# EAGLE board ledunipcb3_withholes_rotated (EAGLE 6.1)
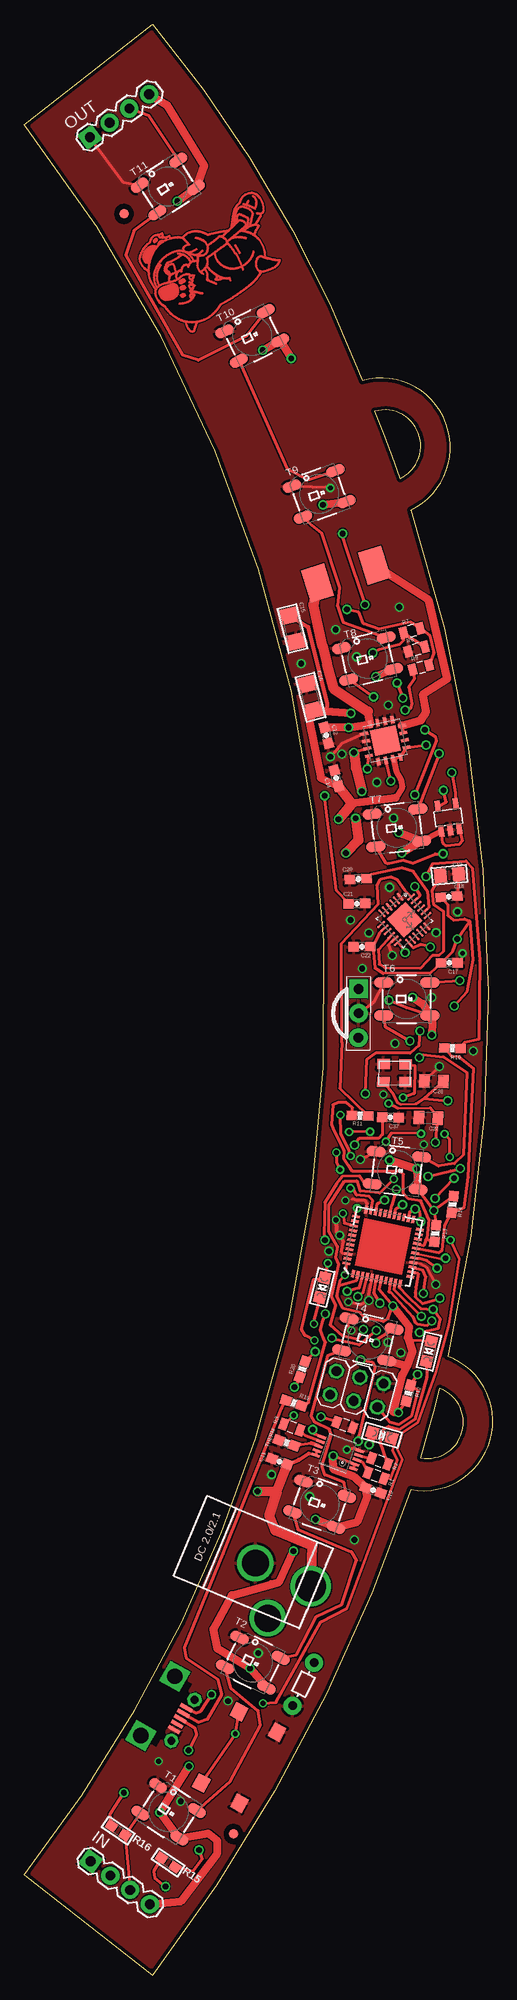
[diagram p0: board, top side]
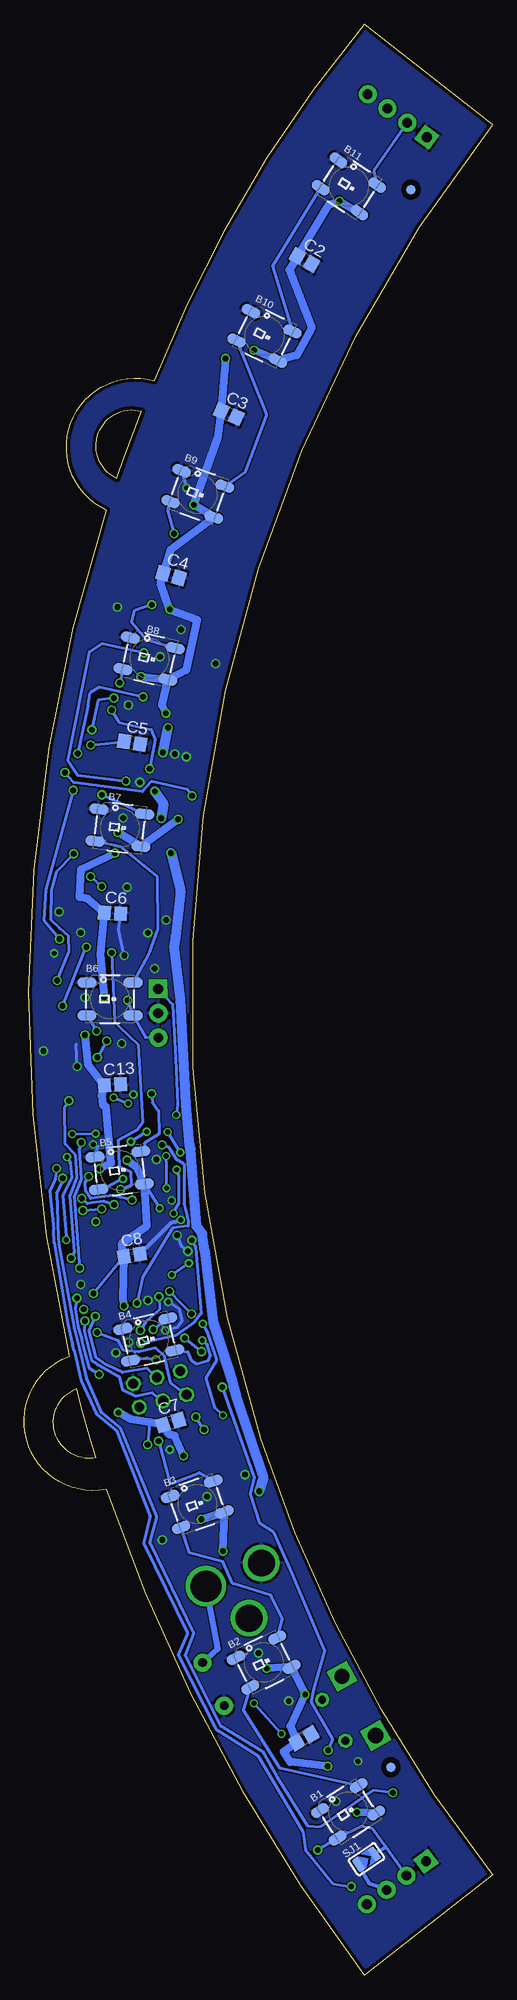
[diagram p1: board, bottom side, seen from below]

Size 48.84 x 203.17 mm. Coordinates in mm from the lower left corner, seen from the top.
Outline: 0,10.47 arc20 24.13,55.85 arc56 0,192.7 13.4,203.17 arc-18 35.26,166.05 arc-170 40.3,152.57 arc-31 44.15,64.47 arc-170 40.3,50.6 arc-18 13.4,0 0,10.47
Outline: 41.33,53.89 arc3 43.33,61.11 arc-170 41.33,53.89
Outline: 39.2,155.85 arc3 36.57,162.86 arc-170 39.2,155.85
Copper layers (1*16): Top 0.0356mm / dielectric 1.5011mm / Bottom 0.0356mm
Design rules: minimum track width 6mil, minimum drill 0.3mm, track to track 5mil, track to pad 5mil, pad to pad 5mil, via to via 5mil, smd to smd 0mil, copper to edge 15mil, drill to drill 6mil, minimum pad ring 7mil, minimum via ring 7mil, stop-mask expansion 3mil, vias tented up to drill 0mil, thermal gap 10mil
Net classes: 1 power: width 0.254 mm, drill 0.61 mm, clearance 0.254 mm; 2 gnd: width 0.254 mm, drill 0.61 mm, clearance 0.254 mm; 3 usbvcc: width 0.254 mm, drill 0.61 mm, clearance 0.254 mm; 4 aref: width 0.254 mm, drill 0.61 mm, clearance 0.254 mm

## Footprints (pad centres in the part's own frame; a part is rotated, then mirrored left to right if it is on the bottom)
WS2812B = smd 2 x 1.1: 1 -2.4,1.7; 2 -2.4,-1.7; 3 2.4,-1.7; 4 2.4,1.7
AXIAL-5MM = drill 0.9 pad 1.88: P$1 -2.5,0; P$2 2.5,0
C0805 = smd 1.3 x 1.5: 1 -0.85,0; 2 0.85,0
0603-CAP = smd 1.1 x 1: 1 -0.85,0; 2 0.85,0
1206 = smd 1.6 x 1.8: 1 -1.4,0; 2 1.4,0
0805 = smd 1.3 x 1.5: 1 -0.95,0; 2 0.95,0
C0805K = smd 1.1 x 1.4: 1 -1,0; 2 1,0
DCJACK_2MM_PTH = drill 2.8: GND 0,7.35; GNDBREAK 4.8,10.75 | drill 3.2: PWR 0,13.6
ZX62D-B-5PA8 = smd 1.35 x 0.4: 1 2.675,1.3; 2 2.675,0.65; 3 2.675,0; 4 2.675,-0.65; 5 2.675,-1.3 | drill 0.8 pad 1.422 octagon: SHIELD@1 3,2.45; SHIELD@2 3,-2.45 | drill 1.6 square: SHIELD@3 0,3.556; SHIELD@4 0,-3.556
1X04 = drill 1.016 pad 1.88 square: 1 0,0 | drill 1.016 pad 1.88: 2 2.54,0; 3 5.08,0; 4 7.62,0
2X03 = drill 1.016 octagon: 1 -2.54,-1.27; 2 -2.54,1.27; 3 0,-1.27; 4 0,1.27; 5 2.54,-1.27; 6 2.54,1.27
CHIPLED_0805 = smd 1.2 x 1.2: A 0,-1.05; C 0,1.05
SOT25 = smd 0.55 x 1.2: 1 -0.95,-1.3; 2 0,-1.3; 3 0.95,-1.3; 4 0.95,1.3; 5 -0.95,1.3
0805' = smd 0.8 x 1.2: 1 -0.9,0; 2 0.9,0
0603-RES = smd 1.1 x 1: 1 -0.85,0; 2 0.85,0
0603 = smd 1.1 x 1: 1 -0.85,0; 2 0.85,0
SOLDERJUMPER_ARROW_NOPASTE = smd 0.762 x 1.524: 1 -1.016,0; 2 1.016,0
QFN16-4X4 = smd 0.8 x 0.35: EN 2,0.392; LBI 2,-1.175; LBO 2,1.175; NC -2,0.392; SW -2,-1.175; SW2 -2,-0.392; SYNC 2,-0.392; VOUT3 -2,1.175 | smd 2.7 x 2.7: EXP 0,0 | smd 0.35 x 0.8: FB 0.392,2; GND 1.175,2; PGND 0.392,-2; PGND2 -0.392,-2; PGND3 -1.175,-2; VBAT 1.175,-2; VOUT -1.175,2; VOUT2 -0.392,2
QFN-24-TESTING = smd 1.016 x 0.254: 1 -2.066,1.257; 2 -2.066,0.75; 3 -2.066,0.247; 4 -2.066,-0.287; 5 -2.066,-0.792; 6 -2.066,-1.297; 13 2.086,-1.297; 14 2.086,-0.792; 15 2.086,-0.287; 16 2.086,0.247; 17 2.086,0.75; 18 2.086,1.257 | smd 0.254 x 1.016: 7 -1.267,-2.122; 8 -0.762,-2.122; 9 -0.258,-2.122; 10 0.278,-2.122; 11 0.78,-2.122; 12 1.287,-2.122; 19 1.287,2.082; 20 0.78,2.082; 21 0.278,2.082; 22 -0.258,2.082; 23 -0.762,2.082; 24 -1.267,2.082 | smd 2.616 x 2.616: P$1 0.02,-0.01
MSOP-10 = smd 0.305 x 0.889: 1 -1,-2.11; 2 -0.5,-2.11; 3 0,-2.11; 4 0.5,-2.11; 5 1,-2.11; 6 1,2.11; 7 0.5,2.11; 8 0,2.11; 9 -0.5,2.11; 10 -1,2.11
SPARKFUN-DIGITALIC_QFN-44 = smd 0.8 x 0.3: 1 -3.4,2.5; 2 -3.4,2; 3 -3.4,1.5; 4 -3.4,1; 5 -3.4,0.5; 6 -3.4,0; 7 -3.4,-0.5; 8 -3.4,-1; 9 -3.4,-1.5; 10 -3.4,-2; 11 -3.4,-2.5; 23 3.4,-2.5; 24 3.4,-2; 25 3.4,-1.5; 26 3.4,-1; 27 3.4,-0.5; 28 3.4,0; 29 3.4,0.5; 30 3.4,1; 31 3.4,1.5; 32 3.4,2; 33 3.4,2.5 | smd 0.3 x 0.8: 12 -2.5,-3.4; 13 -2,-3.4; 14 -1.5,-3.4; 15 -1,-3.4; 16 -0.5,-3.4; 17 0,-3.4; 18 0.5,-3.4; 19 1,-3.4; 20 1.5,-3.4; 21 2,-3.4; 22 2.5,-3.4; 34 2.5,3.4; 35 2,3.4; 36 1.5,3.4; 37 1,3.4; 38 0.5,3.4; 39 0,3.4; 40 -0.5,3.4; 41 -1,3.4; 42 -1.5,3.4; 43 -2,3.4; 44 -2.5,3.4
SRP7030-6R8M = smd 2.5 x 3.5: P$1 -3.1,0; P$2 3.1,0
FIDUCIAL_1MM = smd 1 x 1: 1 0,0
PNA460XM = drill 1.016 pad 1.93 square: 1 -2.54,0 | drill 1.016 pad 1.93: 2 0,0; 3 2.54,0
MC32882 = smd 1.6 x 1.397: P$1 -4.191,2.248; P$2 4.191,2.248; P$3 4.191,-2.248; P$4 -4.191,-2.248
CRYSTAL-3.2-2.5 = smd 1.3 x 1.05: 1 -1.15,-0.925; 2 1.15,-0.925; 3 1.15,0.925; 4 -1.15,0.925

## Placement (x,y rotation side)
B1  WS2812B  [WS2812B]  15.07,17.04 32.7 bottom
B2  WS2812B  [WS2812B]  23.85,32.6 26.2 bottom
B3  WS2812B  [WS2812B]  30.8,49.06 19.6 bottom
B4  WS2812B  [WS2812B]  35.82,66.21 13.1 bottom
B5  WS2812B  [WS2812B]  38.86,83.82 6.5 bottom
B6  WS2812B  [WS2812B]  39.87,101.66 0 bottom
B7  WS2812B  [WS2812B]  38.85,119.5 353.4 bottom
B8  WS2812B  [WS2812B]  35.79,137.1 346.9 bottom
B9  WS2812B  [WS2812B]  30.75,154.25 340.3 bottom
B10  WS2812B  [WS2812B]  23.78,170.7 333.8 bottom
B11  WS2812B  [WS2812B]  14.99,186.26 327.2 bottom
C1  [AXIAL-5MM]  29.11,30.32 243.3 top
C2  [C0805]  19.61,178.61 330.6 bottom
C3  [C0805]  27.5,162.57 337.1 bottom
C4  [C0805]  33.51,145.75 343.6 bottom
C5  [C0805]  37.57,128.34 350.2 bottom
C6  [C0805]  39.61,110.59 356.7 bottom
C7  [C0805]  33.56,57.56 16.4 bottom
C8  [C0805]  37.59,74.97 9.8 bottom
C9  [C0805]  19.68,24.69 29.4 bottom
C10  1uF  [0603-CAP]  36.38,50.51 340.3 top
C11  1uF  [0603-CAP]  26.63,53.5 340.3 top
C12  [0603-CAP]  31.49,129.11 284.3 top
C13  [C0805]  39.62,92.72 3.3 bottom
C14  2.2uF  [0603-CAP]  32.54,124.65 104.3 top
C15  100uF  [1206]  27.98,140.22 284.3 top
C16  100uF  [1206]  29.85,133.09 104.3 top
C17  10nF  [0603-CAP]  44.3,105.42 181.3 top
C18  .01uF  [0603-CAP]  44.28,112.32 184.3 top
C19  0.1uF  [0805]  44.34,114.58 5.3 top
C20  2200pF  [0603-CAP]  34.82,114.15 183.3 top
C21  10nF  [0603-CAP]  34.68,111.6 1.3 top
C22  2.2uF  [0603-CAP]  35.2,107.11 181.3 top
C26  22pF  [C0805K]  42.69,93.1 178.3 top
C27  22pF  [C0805K]  42.13,89.28 178.3 top
C37  1uF  [0603-CAP]  38.18,89.34 178.3 top
CN1  [DCJACK_2MM_PTH]  17.33,45.77 247.3 top
CN3  MiniB USB  [ZX62D-B-5PA8]  13.95,28.05 330.3 top
IN  [1X04]  6.95,11.89 324 top
JP4  ICSP  [2X03]  34.68,61.04 345.3 top
LED10  [CHIPLED_0805]  37.29,56.24 254.3 top
LED12  [CHIPLED_0805]  42.18,64.97 166.3 top
LED14  [CHIPLED_0805]  31.08,71.62 166.3 top
LP2985-33DBVR  LP2985AIM5-3.3  [SOT25]  44.22,120.57 8.3 top
OUT  [1X04]  6.86,191.39 36 top
R1  470  [0805']  36.67,52.04 160.3 top
R2  470  [0805']  37.07,53.55 160.3 top
R3  470  [0805']  27.91,57.09 340.3 top
R4  1k  [0805']  33.42,57.32 340.3 top
R7  [0805']  40.42,140.02 15.3 top
R8  [0805']  40.89,138.08 15.3 top
R9  [0805']  41.36,136.19 15.3 top
R10  10k  [0603-RES]  44.63,96.53 178.3 top
R11  10k  [0603-RES]  35.01,89.51 178.3 top
R12  10k  [0603-RES]  40.06,60.61 255.3 top
R13  [0603-RES]  42.85,77.25 84 top
R14  [0603-RES]  44.66,80.27 84 top
R15  [0603]  15.03,11.76 326 top
R16  [0603]  9.82,15.1 326 top
R19  22  [0603-RES]  28.1,59.61 341.3 top
R20  22  [0603-RES]  29.01,63.14 71.3 top
SJ1  [SOLDERJUMPER_ARROW_NOPASTE]  13.15,12.11 34 bottom
T1  WS2812B  [WS2812B]  15.07,17.04 327.3 top
T2  WS2812B  [WS2812B]  23.85,32.6 333.8 top
T3  WS2812B  [WS2812B]  30.8,49.06 340.4 top
T4  WS2812B  [WS2812B]  35.82,66.21 346.9 top
T5  WS2812B  [WS2812B]  38.86,83.82 353.5 top
T6  WS2812B  [WS2812B]  39.87,101.66 0 top
T7  WS2812B  [WS2812B]  38.85,119.5 6.6 top
T8  WS2812B  [WS2812B]  35.79,137.1 13.1 top
T9  WS2812B  [WS2812B]  30.75,154.25 19.7 top
T10  WS2812B  [WS2812B]  23.78,170.7 26.2 top
T11  WS2812B  [WS2812B]  14.99,186.26 32.8 top
THERM  10k  [0603-RES]  27.35,55.45 340.3 top
TPS61030  TPS61030  [QFN16-4X4]  37.65,128.56 192.3 top
U1  MPU-6000QFN-24  [QFN-24-TESTING]  39.65,109.92 312.3 top
U3  MCP73833  [MSOP-10]  32.68,54.4 70.3 top
U$1  ATMEGA32U4QFN  [SPARKFUN-DIGITALIC_QFN-44]  37.42,75.89 78.3 top
U$2  SRP7030-6R8M  [SRP7030-6R8M]  33.54,145.9 17.3 top
U$3  FIDUCIAL  [FIDUCIAL_1MM]  21.82,14.73 327.3 top
U$4  PNA460XM  [PNA460XM]  34.86,100.17 269.6 top
U$5  FIDUCIAL  [FIDUCIAL_1MM]  8.51,185.94 32.7 bottom
U$6  UNIMONSTER  [UNIMONSTER]  10.9,179.69 299.4 top
U$7  FIDUCIAL  [FIDUCIAL_1MM]  10.41,183.4 147.3 top
U$8  FIDUCIAL  [FIDUCIAL_1MM]  10.61,21.69 327.3 bottom
U$9  MC32882  [MC32882]  22.43,22.69 242 top
Y2  16MHz KX-7  [CRYSTAL-3.2-2.5]  38.6,93.95 179.3 top

## Library data of the parts
B1-B11 T1-T11 = WS2812
C1 C10-C12 C14 C17 C20-C22 = SparkFun-Capacitors
C2-C9 C13 = adafruit; MF: AVX CORPORATION; MPN: 08055C103KAT2A; OC_NEWARK: 19C6332
C15 C16 C19 LED10 LED12 LED14 R15 R16 = microbuilder
C18 R10 R11 R13 R14 R19 R20 THERM = SparkFun-Passives
C26 C27 U$3-U$5 U$7 U$8 = adafruit
C37 = SparkFun
CN1 = adafruit mod
CN3 = base48
IN OUT = SparkFun-Connectors
JP4 = pinhead
LP2985-33DBVR = LP2985
R1-R4 R7-R9 R12 = SparkFun-Resistors
SJ1 = microbuilder; BOM: EXCLUDE
TPS61030 U$2 U$9 = spencer
U1 = SparkFun-Sensors
U3 = SparkFun-PowerIC
U$1 = SparkFun-DigitalIC
U$6 = unimonster
Y2 = SmartPrj

## Nets
3V3: C17.2 C18.2 C22.1 LP2985-33DBVR.5 U1.8 U1.13
5V: B1.3 B2.3 B3.3 B4.3 B5.3 B6.3 B7.3 B8.3 B9.3 B10.3 B11.3 C2.1 C3.1 C4.1 C5.1 C6.1 C7.1 C8.1 C9.1 C10.1 C13.1 C14.1 C15.1 C16.1 CN3.1 IN.4 LED10.A LED12.A LED14.A LP2985-33DBVR.1 LP2985-33DBVR.3 OUT.4 R7.2 R9.2 R12.2 R13.2 R14.2 T1.3 T2.3 T3.3 T4.3 T5.3 T6.3 T7.3 T8.3 T9.3 T10.3 T11.3 TPS61030.VOUT TPS61030.VOUT2 TPS61030.VOUT3 U3.1 U3.2 U$1.2 U$1.7 U$1.14 U$1.24 U$1.34 U$1.44 U$4.3
BUTTON: U$1.36 U$9.P$3 U$9.P$4
BYPASS: C21.1 LP2985-33DBVR.4
D9: U$1.29
D10: U$1.30
D11: U$1.12
DATA_IN1: R16.1 U$1.27
DATA_IN1_A: IN.3 R16.2 SJ1.1 T1.2
DATA_IN1B: R15.1 U$1.31
DATA_IN1B_A: B1.2 IN.2 R15.2 SJ1.2
DATA_OUT1: T1.4 T2.2
DATA_OUT1B: B1.4 B2.2
DATA_OUT2: T2.4 T3.2
DATA_OUT2B: B2.4 B3.2
DATA_OUT3: T3.4 T4.2
DATA_OUT3B: B3.4 B4.2
DATA_OUT4: T4.4 T5.2
DATA_OUT4B: B4.4 B5.2
DATA_OUT5: T5.4 T6.2
DATA_OUT5B: B5.4 B6.2
DATA_OUT6: T6.4 T7.2
DATA_OUT6B: B6.4 B7.2
DATA_OUT7: T7.4 T8.2
DATA_OUT7B: B7.4 B8.2
DATA_OUT8: T8.4 T9.2
DATA_OUT8B: B8.4 B9.2
DATA_OUT9: T9.4 T10.2
DATA_OUT9B: B9.4 B10.2
DATA_OUT10: T10.4 T11.2
DATA_OUT10B: B10.4 B11.2
DATA_OUT11: OUT.3 T11.4
DATA_OUT11B: B11.4 OUT.2
GND: B1.1 B2.1 B3.1 B4.1 B5.1 B6.1 B7.1 B8.1 B9.1 B10.1 B11.1 C1.P$2 C2.2 C3.2 C4.2 C5.2 C6.2 C7.2 C8.2 C9.2 C10.2 C11.1 C12.2 C13.2 C14.2 C15.2 C16.2 C17.1 C18.1 C19.2 C20.2 C21.2 C22.2 C26.2 C27.2 C37.1 CN1.GND CN3.5 IN.1 JP4.6 LP2985-33DBVR.2 OUT.1 R4.2 R8.1 T1.1 T2.1 T3.1 T4.1 T5.1 T6.1 T7.1 T8.1 T9.1 T10.1 T11.1 THERM.1 TPS61030.GND TPS61030.LBI TPS61030.PGND TPS61030.PGND2 TPS61030.PGND3 TPS61030.SYNC U1.1 U1.11 U1.18 U3.5 U$1.5 U$1.15 U$1.33 U$1.42 U$4.2 U$9.P$1 U$9.P$2 Y2.2 Y2.4
GNDBREAK: CN1.GNDBREAK
INT: U1.12 U$1.28
IR_SENS: U$1.32 U$4.1
LOWBATOUT: R9.1 TPS61030.LBO
MISO: JP4.1 U$1.11
MOSI: JP4.4 U$1.10
N$1: LED12.C R2.1
N$2: R1.2 U3.3
N$3: R2.2 U3.4
N$4: R3.2 U3.7
N$5: R7.1 R8.2 TPS61030.FB
N$6: R10.1 U1.23
N$7: R11.1 U1.24
N$10: R20.2 U$1.4
N$11: U$1.43
N$12: TPS61030.SW TPS61030.SW2 U$2.P$2
N$13: LED10.C R1.1
N$14: LED14.C R3.1
N$15: THERM.2 U3.8
N$16: R4.1 U3.6
N$19: C19.1 U1.10
N$20: C20.1 U1.20
N$21: CN3.2 R19.1
N$22: CN3.3 R20.1
N$31: U$1.23
N$32: U$1.35
N$34: R19.2 U$1.3
N$44: C37.2 U$1.6
RST: JP4.5 R12.1 U$1.13
SCK: JP4.3 U$1.9
SCL: R10.2 R14.1 U$1.18
SDA: R11.2 R13.1 U$1.19
SS: U$1.8
VBAT: C1.P$1 C11.2 C12.1 CN1.PWR TPS61030.EN TPS61030.VBAT U3.9 U3.10 U$2.P$1
XTAL3: C26.1 U$1.17 Y2.3
XTAL4: C27.1 U$1.16 Y2.1

## Tracks (layer width: path | path; a pad name or v marks a point on that pad's centre or on a via)
3V3  (via drill 0.6)
  Top 0.305: C18.2 44.14,111.49 44.15,110.37 44.75,109.86 45.92,109.99 46.43,109.8 | 46.43,109.8 46.76,105.73 46.12,102.37 v44.82,100.94 | v42.34,107.06 41.36,107.31 40.56,107 U1.13 | LP2985-33DBVR.5 44.02,122.18 v43.7,123.39 | 36.35,107.13 37.01,108.52 U1.8 | 36.35,107.13 C22.1 | 46.43,109.8 v45.14,107.9 44.67,106.58 C17.2 42.33,104.35 37.43,104.31 36.56,104.88 36.35,107.13
  Bottom 0.305: v44.82,100.94 v42.34,107.06 | v43.7,123.39 46.55,113.03 46.78,109.87 v45.14,107.9
5V  (via drill 0.5, 0.6)
  Top 0.305: v41.89,128.1 TPS61030.VOUT3 TPS61030.VOUT TPS61030.VOUT2 | R9.2 42.68,137.75 42.3,139.49 R7.2 40.27,140.92 36.97,140.16 35.38,140.73 34.87,141.94 v33.65,142.23 | T6.3 39.8,100.76 v38.03,101.53 | T5.3 41.86,80.81 v42.7,79.65 | U$1.24 40.19,79.5 v40.75,79.8 41.21,79.56 v41.36,78.47 | v41.6,71.01 41.89,72.75 41.54,73.43 U$1.14 | U$1.7 36.99,71.41 v38.42,69.7 37.92,68.39 37.42,68.07 35.41,68.53 34.98,69.04 33.24,69.47 32.61,70.76 32.82,71.82 | U$1.2 34.61,72.33 32.82,71.82 | v19.55,29.25 18.41,27.53 17.92,27.34 CN3.1 | U3.1 U3.2 v32.2,54.09 | LED12.A 40.43,66.12 39.97,66.42 | v31.67,74.16 LED14.A 30.18,72.49 28.91,67.27 29.26,66.62 v30.27,66.11 | 32.82,71.82 32.94,72.4 v33.44,72.93 U$1.44 | LP2985-33DBVR.3 45.67,118.13 45.36,117.77 44.02,117.61 43.65,117.92 LP2985-33DBVR.1 | v34.7,79.89 34.53,79.62 U$1.34 | R12.2 v39,58.61 | v42.7,79.65 R13.2 | v42.7,79.65 R14.2
  Top 0.406: C15.1 29.6,140.38 31.57,132.44 31.53,131.62
  Top 0.61: TPS61030.VOUT2 38.81,125.29 39.26,124.53 39.41,123.66 38.72,122.59 | T7.3 LP2985-33DBVR.1
  Top 0.762: 39.97,66.42 40.17,67.53 v38.42,69.7
  Top 0.813: OUT.4 14.87,194.75 18.76,188.41 T11.3 v15.98,184.73 | v24.88,169.2 T10.3 v27.84,168.35 | v31.15,153.11 T9.3 | T8.3 v36.65,135.23 | C14.1 30.92,124.67 29.75,130.5 C16.1 31.53,131.62 v34.05,131.41 | v39.05,118.98 T7.3 v39.36,116.85 | v40.49,101.83 41.56,101.15 T6.3 42.47,99.48 42.53,99.26 v42.5,97.9 | T5.3 v40.95,83.99 v38.09,84.88 | IN.4 16.36,7.73 20.14,12.75 20.14,14.02 19.15,14.79 T1.3 v14.15,16.99 v17.19,21.79 | T2.3 v23.55,31.96 20.16,34.01 19.73,36.04 21.66,39.59 25.78,40.72 26.6,40.99 v28.09,44.18 | v30.37,47.49 T3.3 34.72,47.23 35.76,49.86 C10.1 34.4,51.88 32.24,52.71 v32.2,54.09 | 39.97,66.42 40.47,64.96 39.91,63.42 | LED10.A v35.96,55.27 | 39.91,63.42 39.41,62.53 38.48,58.68 v39,58.61 | 39.91,63.42 T4.3 | 38.72,122.59 34.18,122.02
  Top 1.016: v32.77,120.37 34.18,122.02 C14.1
  Bottom 0.305: v41.89,128.1 C5.1 | v38.03,101.53 B6.3 36.18,97.65 U$4.3 | 40.64,90.61 40.33,90.47 | v42.7,79.65 v40.75,79.8 | C8.1 v41.6,71.01 | 35.75,57.6 v35.96,55.27 | v31.67,74.16 v33.44,72.93 | B4.3 31.78,64.92 31.42,64.04 30.87,63.65 29.6,64.04 29.38,64.53 29.76,65.72 v30.27,66.11 | B5.3 v34.7,79.89
  Bottom 0.813: B11.3 v15.98,184.73 17.1,184.35 C2.1 21.19,177.58 18.85,171.56 20.4,168.68 B10.3 v24.88,169.2 | v27.84,168.35 C3.1 28.65,160.09 v31.15,153.11 B9.3 33.58,148.44 C4.1 34.59,144.89 v33.65,142.23 30.78,141.16 31.93,135.89 B8.3 | v36.65,135.23 B8.3 | v34.05,131.41 34.46,132.24 B8.3 | v32.77,120.37 B7.3 v39.05,118.98 | v39.36,116.85 42.9,115.19 43.04,112.27 42.16,112.08 C6.1 40.88,106.3 v40.49,101.83 | v42.5,97.9 42.19,94.89 C13.1 40.76,91.62 40.64,90.61 | 40.33,90.47 39.89,85.62 39.8,84.57 v40.95,83.99 | v38.09,84.88 37.07,84.11 B5.3 36.02,78.05 38.66,76.21 C8.1 38.56,70.43 v38.42,69.7 | B1.3 v14.15,16.99 | v23.55,31.96 B2.3 v19.55,29.25 21.1,25.98 C9.1 21.77,23.3 21.08,22.23 v17.19,21.79 | v28.09,44.18 B3.3 v30.37,47.49 | v32.2,54.09 33.12,56.18 33.7,56.31 C7.1 35.75,57.6 37.7,57.92 v39,58.61
BUTTON  (via drill 0.5)
  Top 0.254: 33.62,38.21 39.42,53.74 38.89,54.79 39.4,56.47 41.04,57.56 42.89,62.77 44.25,67.73 45.37,74.62 v44.44,76.57
  Top 0.305: v24.89,28.33 26.26,28.42 30.95,36.84 33.62,38.21 | v44.36,85.21 44.34,87.06 v43.82,87.62 | v41.38,87.65 38.3,87.7 v37.69,86.81 | v36.06,87.85 v33.88,87.82 | v33.24,79.33 33.38,78.3 U$1.36 | v32.56,85.69 32.56,84.65 v32.94,83.89 | U$9.P$4 v22.02,25.17 U$9.P$3
  Bottom 0.305: v22.02,25.17 v24.89,28.33 | v44.44,76.57 44.37,77 44.77,81.22 43.83,83.09 43.95,84.6 v44.36,85.21 | v43.82,87.62 v41.38,87.65 | v37.69,86.81 v36.06,87.85 | v33.88,87.82 v32.56,85.69 | v32.94,83.89 32.72,83.25 32.75,80.36 33.21,79.62 v33.24,79.33
BYPASS  (via drill 0.6)
  Top 0.305: C21.1 32.55,112.97 v31.32,122.81 | v44.58,125.24 44.96,123.16 LP2985-33DBVR.4
  Bottom 0.305: v44.58,125.24 43.68,124.2 36.51,123.25 35.54,124.34 31.83,123.54 v31.32,122.81
DATA_IN1  (via drill 0.6)
  Top 0.305: U$1.27 38.76,79.86 v39.45,80.24 | v42.83,80.89 v44.81,83.01 | v10.4,19.02 8.96,16.81 R16.1
  Bottom 0.305: v39.45,80.24 39.51,80.2 40.55,80.59 42.25,80.37 v42.83,80.89 | v44.81,83.01 44.85,82.65 45.44,81.48 45.25,76.82 45.2,76.21 45.05,75.32 43.76,68.31 43.63,67.41 43.06,65.1 42.31,62.06 40.81,58.61 38.82,57.03 35.03,47.72 35.75,45.08 31.16,35.6 32.07,33.33 28.4,26.05 24.01,23.33 22.47,20.7 19.31,15.6 17.95,15.5 12.46,19.28 v10.4,19.02
DATA_IN1_A
  Top 0.305: T1.2 R16.2 IN.3
  Bottom 0.406: IN.3 12.84,9.57 SJ1.1
DATA_IN1B  (via drill 0.6)
  Top 0.305: U$1.31 36.83,80.38 v37.58,80.72 | v42.1,83.18 44.45,83.79 v45.44,84.03 | v14.74,9.25 13.61,10.19 13.5,10.84 R15.1
  Bottom 0.305: v37.58,80.72 39.59,81.2 41.91,80.88 42.42,81.69 42.46,82.56 v42.1,83.18 | v45.44,84.03 45.6,82.93 46.14,81.67 45.76,77.67 45.68,76.28 44.28,67.89 43.77,65.6 43.62,65.07 42.86,61.92 41.29,58.42 39.18,56.72 35.71,47.78 36.36,44.98 31.8,35.63 32.77,33.39 28.81,25.64 24.46,22.86 19.8,14.94 19.5,13.06 16.65,9.57 v14.74,9.25
DATA_IN1B_A  (via drill 0.6)
  Top 0.305: v18.23,13.06 18.55,12.11 17.6,10.84 R15.2
  Bottom 0.305: v18.23,13.06 B1.2 13.63,15.51 12.52,15.26 11.15,13.37 IN.2
  Bottom 0.406: SJ1.2 11.15,13.37
DATA_OUT1
  Top 0.305: T1.4 21.46,20.16 24.62,26.04 24.4,27.56 21.54,29.92 T2.2
DATA_OUT1B
  Bottom 0.305: B1.4 22.15,21.55 25.99,27.61 B2.2
DATA_OUT2
  Top 0.305: T2.4 28.36,33.4 30.48,37.4 33.13,38.65 34.65,43.21 34.12,44.11 28.53,46.42 T3.2
DATA_OUT2B
  Bottom 0.305: B2.4 21.89,37.12 23.1,39.6 27.1,40.8 28.08,43.06 31.58,43.98 B3.2
DATA_OUT3
  Top 0.305: T3.4 33.35,51.33 31.34,52.11 31.06,53.07 32.04,56.26 31.84,56.87 30.34,57.57 29.9,58.32 31.62,64.51 T4.2
DATA_OUT3B  (via drill 0.6)
  Top 0.305: v35.07,64.08 36.28,63.86 36.57,63.31 34.87,56.19 v34.82,55.64
  Bottom 0.305: B4.2 36.04,64.32 v35.07,64.08 | v34.82,55.64 33.62,51.16 30.6,52.34 B3.4
DATA_OUT4  (via drill 0.6)
  Top 0.305: T5.2 35.48,82.46 34.96,83.23 33.18,83.2 32.55,82.41 31.34,80.49 31.26,77.17 v31.36,76.56 | v36.66,65.83 36.76,66.2 T4.4
  Bottom 0.305: v31.36,76.56 30.96,75.81 30.38,68.9 31.07,68.06 33.06,66.62 v36.66,65.83
DATA_OUT4B  (via drill 0.5, 0.6)
  Top 0.305: v35.37,67.26 34.74,66.24 33.23,66.57 31.9,67.72 32.48,69.76 32.05,70.74 32.78,74.01 32.46,74.78 32.66,75.92 31.78,77.45 31.79,80.21 32.95,82.04 33.39,82.71 34.68,82.74 35.01,81.67 37.07,81.44 v38.54,82.92
  Bottom 0.305: B4.4 v35.37,67.26 | v38.54,82.92 39.95,82.18 B5.2
DATA_OUT5  (via drill 0.6)
  Top 0.305: T6.2 37.61,98.78 v40.22,97.29 | v41.19,95.57 41.56,95.86 43.68,95.64 46.18,93.95 45.81,85.49 44.84,84.51 43.17,84.26 T5.4
  Bottom 0.305: v40.22,97.29 v41.19,95.57
DATA_OUT5B  (via drill 0.6)
  Top 0.305: v41.26,98.32 41.14,96.8 40.23,96.03 36.66,96.02 35.7,95.35 v35.56,91.8
  Bottom 0.305: B6.2 v41.26,98.32 | v35.56,91.8 35.46,90.89 34.79,90.02 34.75,87.63 36.27,86.65 36.32,85.78 B5.4
DATA_OUT6  (via drill 0.6)
  Top 0.305: T7.2 37.63,115.85 37.93,115.77 39.54,116.11 40.51,115.8 42.83,116.77 v43.67,116.77 | T6.4 v45.39,103.59
  Bottom 0.305: v43.67,116.77 45.46,114.87 45.99,112.94 46.07,109.94 45.13,109.03 44.21,108.25 44.2,106.5 v45.39,103.59
DATA_OUT6B
  Bottom 0.305: B7.2 38.9,117.57 34.99,114.42 34.9,108.93 35.83,106.33 B6.4
DATA_OUT7  (via drill 0.6)
  Top 0.305: T8.2 v36.43,133.12 | v43.25,127.21 T7.4
  Bottom 0.305: v43.25,127.21 42.17,132.26 41.93,133.55 41.01,134.12 v36.43,133.12
DATA_OUT7B  (via drill 0.6)
  Top 0.305: v38.87,134.57 v39.47,132.99 | v41.77,129.69 42.84,129 42.93,128.56 v40.71,122.93
  Bottom 0.305: B8.2 v38.87,134.57 | v39.47,132.99 41.09,132.76 v41.77,129.69 | v40.71,122.93 B7.4
DATA_OUT8
  Top 0.305: T9.2 29.96,150.98 30.97,150.18 32.87,144.48 32.65,142.6 33.23,140.91 T8.4
DATA_OUT8B  (via drill 0.6)
  Top 0.305: v33.21,150.12 33.16,149.77 33.54,148.63 v35.53,142.71
  Bottom 0.305: B9.2 33.89,152.5 v33.21,150.12 | B8.4 36.05,139.07 37.64,140.91 37.29,142.12 v35.53,142.71
DATA_OUT9
  Top 0.305: T10.2 27.4,156.88 29.65,155.75 T9.4
DATA_OUT9B
  Bottom 0.305: B10.2 23.59,162.49 25.81,156.54 B9.4
DATA_OUT10
  Top 0.305: T11.2 11.47,181.7 10.61,179.12 16.53,168.71 18.17,168.15 23.18,170.67 T10.4
DATA_OUT10B
  Bottom 0.305: B11.2 22.97,177.98 B10.4
DATA_OUT11
  Top 0.305: OUT.3 12.99,193.66 T11.4
DATA_OUT11B
  Bottom 0.305: OUT.2 12.37,187.9 B11.4
GND  (via drill 0.5, 0.6)
  Top 0.254: U$1.15 41.35,74.08 41.95,73.73 v42.92,71.94
  Top 0.305: OUT.1 10.34,186.72 T11.1 | v35.05,84.95 T5.1 | C19.2 C18.1 45.6,112.14 | U1.11 37.95,107.28 v38.39,106.2 | C26.2 v43.29,94.64 | U$1.5 35.88,70.91 v35.93,70.28 35.04,69.81 v33.8,70.13 | v33.64,54.74 34.34,54.91 U3.5 | U$1.42 33.2,75.2 33.07,75.35 33.29,76.4 v32.9,77.06 | T4.1 33.68,67.72 v34.11,67.15 | v31.91,154.88 30.06,154.94 T9.1 | U$1.33 35.78,80.33 35.54,80.68 34.66,80.71 34.21,80.84 | C27.2 41.41,89.17 | T6.1 36.38,101.3 U$4.2 | v31.93,126.87 33.15,128.3 35,129.13 TPS61030.LBI
  Top 0.406: v32.5,78.65 32.56,77.46 v32.9,77.06
  Bottom 0.305: v38.39,106.2 38.96,108.85 C6.2 | v43.29,94.64 43.39,96.95 | v31.76,75.41 32.45,75.96 v32.9,77.06 | v33.8,70.13 32.68,69.39 32.38,68.17 32.81,67.47 v34.11,67.15 | B9.1 v31.91,154.88 | B5.1 41.11,86.34 | B2.1 25.64,33.5
  Bottom 0.406: C8.2 33.48,78.39 v32.5,78.65
  other vias: 36.76,124.23 45.18,110.74 34.02,109.87 38.09,113.28 42.93,108.57 42.5,101.81 38.66,97.03 35.24,104.83 35.94,108.55 21.26,28.58 39.26,64.83 29.76,49.86 34.42,45.36 37.93,65.93 45.7,106.41 33.48,80.68 14.03,22.31 41.64,86.53 37.43,91.72 33.13,127.18 25.8,52.14 24.4,33.57 39.1,142.47 37.96,132.28 34.66,137.29 32.47,140.12 38.5,120.51 28.89,136.59 46.81,96.25 16.33,18.14
  pour Bottom: -69.71,246.74 118.45,249.16 125.59,-16.09 -83.54,-17.13
  pour Top: -73.52,248.01 155.35,238.02 129.37,-5.79 -82.27,-4.43
INT  (via drill 0.6)
  Top 0.305: U1.12 39.34,107.1 v39.7,106.49 | v38.78,81.84 38.31,80.22 U$1.28
  Bottom 0.305: v39.7,106.49 39.39,99.32 38.87,98.72 36.96,96.93 36.46,88.83 36.97,88.14 39.05,86.98 38.91,84.22 37.74,83.69 37.66,82.28 v38.78,81.84
IR_SENS  (via drill 0.5)
  Top 0.305: U$1.32 36.34,80.68 35.95,81.11 34.66,81.25 34.34,81.95 v33.99,81.97 | v34.02,85.33 33.83,85.98 33.02,87.59 v32.98,89.6
  Bottom 0.305: U$4.1 33.34,101.1 33.04,95.49 32.84,90.69 v32.98,89.6 | v33.99,81.97 33.96,84.24 v34.02,85.33
LOWBATOUT  (via drill 0.6)
  Top 0.305: v35.76,125.62 TPS61030.LBO | R9.1 40.65,134.95 40.08,134.13 40.43,132.41 40.27,131.9 v39.7,131.75
  Bottom 0.305: v39.7,131.75 38.9,130.44 35.57,129.71 35.16,128.67 v35.76,125.62
MISO  (via drill 0.6)
  Top 0.305: U$1.11 39.08,71.61 39.91,70.79 41.31,69.46 v42.62,69.36 43.39,68.32 43.17,67.37 v41.22,66.95
  Bottom 0.305: JP4.1 33.55,61.7 34.18,64.46 35.13,65.31 36.91,64.93 38.43,65.09 39.01,66.14 v41.22,66.95
MOSI  (via drill 0.6)
  Top 0.305: U$1.10 38.55,71.42 v41.39,68.63
  Bottom 0.305: JP4.4 36,63.18 38.57,62.77 40.21,63.59 41.31,64.33 42.05,67.09 v41.39,68.63
N$1
  Top 0.305: R2.1 37.35,54.92 37.12,55.44 37.45,56.9 37.98,57.17 39.18,56.87 40.72,57.88 41.96,62.33 LED12.C
N$2
  Top 0.305: U3.3 35.25,53.47 R1.2
N$3
  Top 0.305: U3.4 36.07,53.81 36.65,54.12 R2.2
N$4
  Top 0.305: U3.7 29.3,56.19 R3.2
N$5  (via drill 0.6)
  Top 0.305: v38.21,124.34 TPS61030.FB | v36.35,137.69 37.03,138.06 39.13,138.57 39.54,138.98 R7.1 R8.2
  Bottom 0.305: v36.35,137.69 40.73,138.65 42.07,137.79 44.29,126.56 43.26,124.96 v38.21,124.34
N$6  (via drill 0.6)
  Top 0.305: U1.23 41.27,112.46 v40.73,113.37 | v41.9,114.4 42.59,115.75 46.05,116.03 46.7,115.3 47.47,105.65 47.38,97.46 45.89,97.16 R10.1
  Bottom 0.305: v40.73,113.37 v41.9,114.4
N$7
  Top 0.305: U1.24 39.67,112.96 38.88,114.05 38.21,114.34 37.08,114.09 36.75,113.51 36.88,111.51 33.02,107.41 33.09,97.2 33.1,97.17 32.9,92.37 R11.1
N$10  (via drill 0.6)
  Top 0.305: U$1.4 35.33,71.11 v34.78,70.67 | R20.2 v30.34,64.95 | v32.09,66.36 32.4,66.2 34.94,65.63 v36.71,67.17
  Bottom 0.305: v34.78,70.67 34.71,69.32 36.14,68.03 v36.71,67.17 | v30.34,64.95 v32.09,66.36
N$12
  Top 0.305: TPS61030.SW2 39.48,129.61 TPS61030.SW
  Top 0.813: TPS61030.SW 41.35,130.69 41.89,131.55 41.58,133.39 44.09,135.01 42.17,143.18 U$2.P$2
N$13
  Top 0.254: R1.1 38.19,51.7 38.88,53.67 38.39,54.66 38.42,54.71 38.66,55.62
  Top 0.305: LED10.C 38.66,55.62
N$14  (via drill 0.5)
  Top 0.305: R3.1 v28.1,58.32 | v30.2,67.83 30.15,68.1 LED14.C
  Bottom 0.305: v28.1,58.32 28.93,59.07 29.86,62.23 28.74,64.09 29.7,66.99 v30.2,67.83
N$15
  Top 0.305: 29.93,55.41 THERM.2
  Top 0.406: U3.8 29.93,55.41
N$16  (via drill 0.6)
  Top 0.305: U3.6 30.18,56.39 v30.08,56.82 | R4.1 v30.94,58.16
  Bottom 0.305: v30.08,56.82 v30.94,58.16
N$19
  Top 0.305: C19.1 42.5,112.95 42.65,111.5 43.71,110.78 43.69,106.63 43.23,106.21 42.53,106.18 41.28,104.85 37.64,104.88 37,105.29 36.91,106.77 U1.10
N$20
  Top 0.305: U1.20 42.2,111.19 42.02,112.89 40.59,114.95 39.35,115.32 36.15,114.63 C20.1
N$21
  Top 0.305: R19.1 26.84,59.03 20.75,43.88 16.72,34.14 16.92,33.03 20.19,30.81 20.61,29.28 19.13,26.65 18.24,26.36 CN3.2
N$22  (via drill 0.6)
  Top 0.305: CN3.3 17.75,25.79 17.95,25.06 v17.14,23.44 | v28.18,61.25 28.4,61.54 R20.1
  Bottom 0.305: v17.14,23.44 16.66,24.58 17.99,26.94 18.89,28.47 18.61,29.78 17.48,33.8 21.1,42.28 22.8,46.11 24.25,47.09 25.26,50.14 24.83,51.87 v28.18,61.25
N$34  (via drill 0.6)
  Top 0.305: U$1.3 34.92,71.56 v33.67,71.23 | R19.2 29.65,59.66 31.42,65.92 31.22,66.36 30.88,67.19 31.12,68.16 v31.39,68.86
  Bottom 0.305: v33.67,71.23 32.5,69.99 v31.39,68.86
N$44  (via drill 0.6)
  Top 0.305: C37.2 37.35,87.54 36.95,87.16 34.91,87.13 v34.44,86.47 | v37.07,70 36.44,71.08 U$1.6
  Bottom 0.305: v37.07,70 36.5,72.7 33.36,77.82 31.73,78.02 31.73,78.65 32.18,80.33 32.16,84.47 32.94,84.94 33.7,86.21 v34.44,86.47
RST  (via drill 0.6)
  Top 0.305: U$1.13 41.08,73.08 40.8,71.64 40.76,71.1 40.76,70.65 41.51,69.94 v43.32,70.51 | JP4.5 38.1,57.65 39.11,57.39 40.34,58.22 41.02,60.89 R12.1 v41.01,62.58
  Bottom 0.305: v43.32,70.51 43.48,69.47 43.23,67.7 42.78,66.04 42.61,65.42 42,63.18 v41.01,62.58
SCK  (via drill 0.6)
  Top 0.305: U$1.9 38.01,71.17 38.15,71.15 40.53,68.59 40.72,68.05 40.97,67.85 42.03,67.7 v42.48,68.15
  Bottom 0.305: JP4.3 35.47,60.66 37.23,60.3 38.49,60.89 38.88,62.32 41.33,63.73 41.71,63.94 42.53,67.03 v42.48,68.15
SCL
  Top 0.305: U$1.18 43.19,75.24 43.58,75.51 43.83,78.11 R14.1 45.85,79.95 46.31,83.13 46.85,94.43 45.36,95.64 44.59,95.67 R10.2
SDA
  Top 0.305: R11.2 34.23,90.36 33.58,90.87 32.75,90.9 32.18,90.65 32.04,88.62 32.21,88.17 33.33,85.84 33.29,85.1 33.8,84.34 34.16,83.78 35.75,83.73 39.04,83.74 39.54,83.44 39.55,81.44 40.06,80.85 41.35,80.64 42.19,78.73 41.95,76.72 41.85,76.6 | 41.85,76.6 41.64,76 U$1.19 | R13.1 41.85,76.6
VBAT  (via drill 0.6)
  Top 0.305: TPS61030.EN v34.37,127.32 | 29.66,54.34 U3.10 U3.9
  Top 0.406: C11.2 28.63,53.68 29.66,54.34
  Top 0.813: 35.84,131.61 TPS61030.VBAT v33.83,129.91 C12.1
  Top 1.016: 35.84,131.61 32.3,133.91 31.57,136.59 31.07,138.44 30.14,142.73 U$2.P$1 | v34.37,127.32 34.56,125.75 v35.2,123.27 | v34.55,120.49 34.85,118.21 v33.54,116.86 | v24.33,50.4 26.35,50.43 | 26.35,50.43 C11.2 | 26.35,50.43 25.54,47.89 26.17,46.32 30.07,44.72 CN1.PWR
  Bottom 0.61: C1.P$1 28.63,33.99 CN1.PWR
  Bottom 1.016: v34.37,127.32 v33.83,129.91 | v35.2,123.27 34.31,121.99 v34.55,120.49 | v33.54,116.86 32.55,112.97 33.06,108.19 33.19,107.26 32.53,101.61 32.05,92.62 31.96,90.68 31.58,86.43 31.48,86.02 30.88,78.01 30.27,77.25 30,75.48 29.12,67.97 28.24,65.29 27.16,61.91 27.02,61.29 26.75,60.33 23.91,51.85 v24.33,50.4
XTAL3  (via drill 0.6)
  Top 0.254: v43.93,74.69 43.42,74.6 U$1.17 | 38.96,90.86 39.26,90.68 40.81,90.75
  Top 0.305: C26.1 41.64,91.28 | 41.64,91.28 v44.16,91.07 | 38.96,90.86 38.53,91.68 Y2.3 | 41.64,91.28 40.81,90.75
  Bottom 0.305: v43.93,74.69 43.62,75.28 44.1,81.18 43.34,83.09 43.51,85.47 44.56,86.56 44.59,90.43 v44.16,91.07
XTAL4  (via drill 0.5, 0.6)
  Top 0.254: 38.96,90.28 42.32,90.34 | 41.14,74.63 U$1.16
  Top 0.305: 42.32,90.34 C27.1 42.94,88.21 v42.86,86.73 | v43.03,73.64 42.01,74.41 41.14,74.63 | Y2.1 40.73,94.74 40.65,91.8 v39.5,91.4 | 38.96,90.28 v37.99,90.79
  Bottom 0.305: v42.86,86.73 43.1,86.02 42.88,82.91 43.63,81.09 43.13,74.86 v43.03,73.64 | v39.5,91.4 v37.99,90.79